# EAGLE board dome-board2 (EAGLE 5.09)
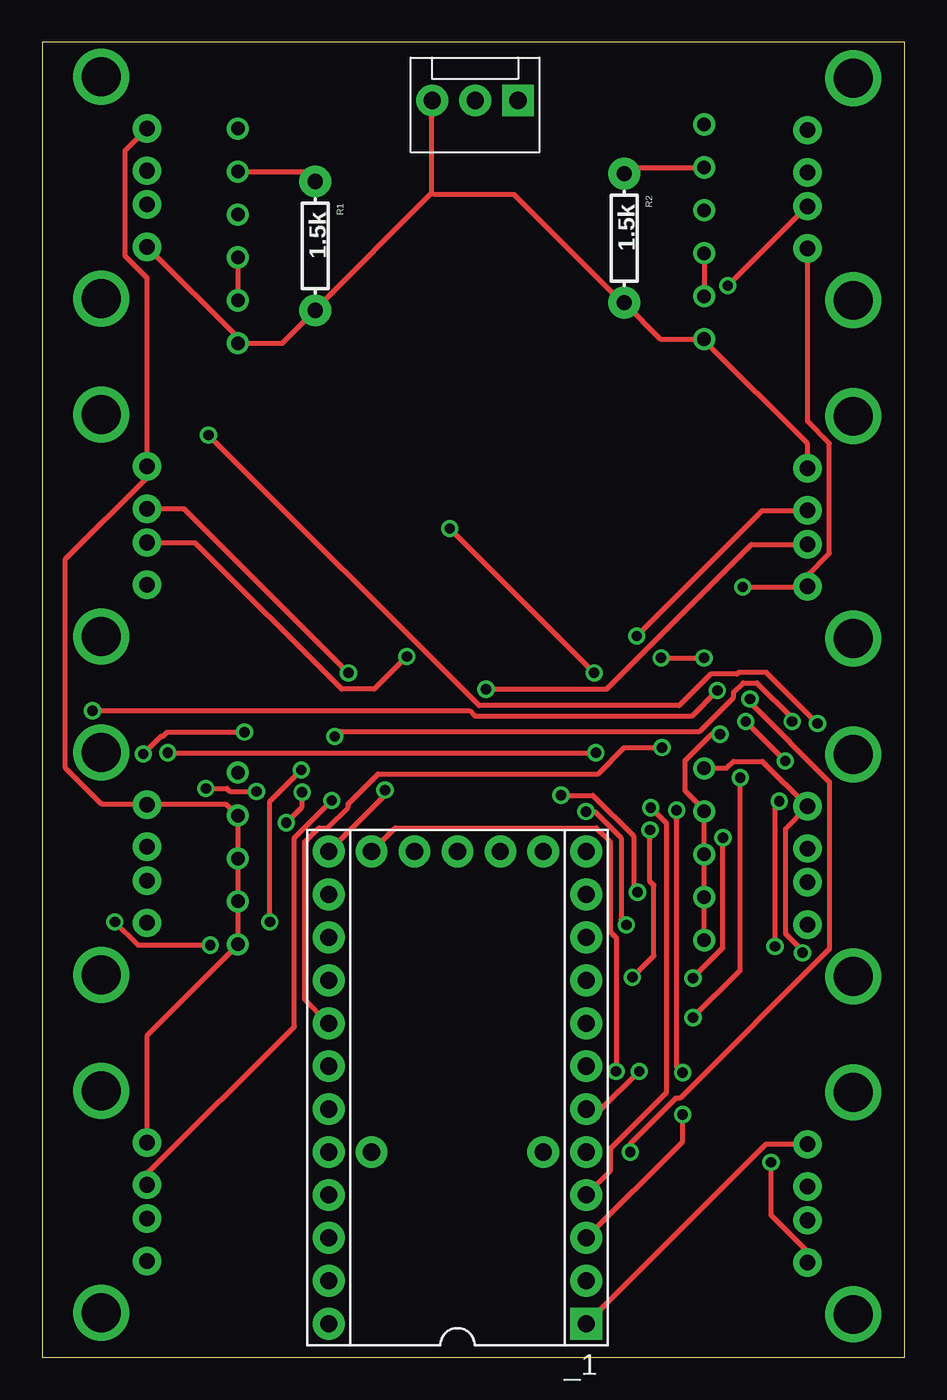
[diagram p0: board, top side]
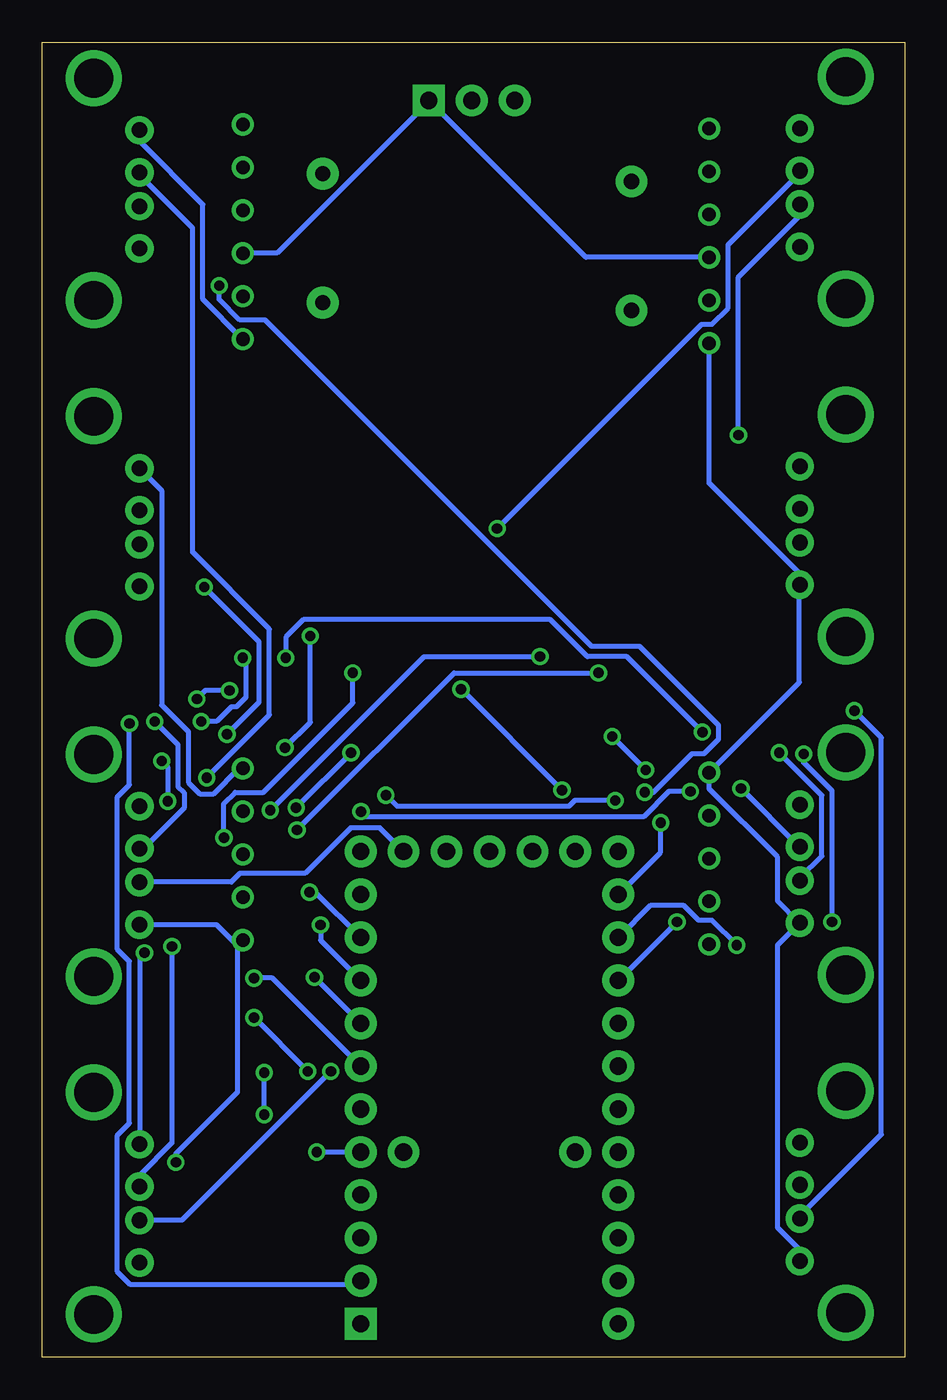
[diagram p1: board, bottom side, seen from below]

Size 51 x 77.8 mm. Coordinates in mm from the lower left corner, seen from the top.
Outline: 0,0 51,0 51,77.8 0,77.8 0,0
Copper layers (1*16): Top 0.035mm / dielectric 1.5mm / Bottom 0.035mm
Design rules "default": minimum track width 10mil, minimum drill 24mil, track to track 8mil, track to pad 8mil, pad to pad 8mil, via to via 8mil, smd to smd 8mil, copper to edge 40mil, drill to drill 8mil, minimum pad ring 10mil, minimum via ring 8mil, stop-mask expansion 4mil, vias tented up to drill 0mil, thermal gap 10mil
Net classes: 0 default: width 0.305 mm, clearance 0.305 mm; 1 power: width 3.124 mm, clearance 0.635 mm
Holes 3.2 mm at -9.7,6.3 100.2,83.8 97.6,90.7 98,3.2

## Footprints (pad centres in the part's own frame; a part is rotated, then mirrored left to right if it is on the bottom)
TEENSY = drill 1.016 pad 1.88 round: 5V2 13.97,-2.54; +5V -13.97,7.62; B0 -11.43,-7.62; B1 -8.89,-7.62; B2 -6.35,-7.62; B3 -3.81,-7.62; B4 8.89,7.62; B5 6.35,7.62; B6 3.81,7.62; B7 -1.27,-7.62; C6 11.43,-7.62; C7 13.97,-7.62; D0 1.27,-7.62; D1 3.81,-7.62; D2 6.35,-7.62; D3 8.89,-7.62; D4 13.97,5.08; D5 13.97,-5.08; D6 13.97,7.62; D7 11.43,7.62; E6 -3.81,-5.08; F0 -11.43,7.62; F1 -8.89,7.62; F4 -6.35,7.62; F5 -3.81,7.62; F6 -1.27,7.62; F7 1.27,7.62; GRND1 13.97,0; REF -3.81,5.08; RST 13.97,2.54 | drill 1.016 pad 1.88 square: GND -13.97,-7.62
OKX2-T/16-D12P-C = drill 0.8 round: GND@1 13.97,0; GND@2 -11.43,0; NC -19.05,0; ON/OFF -24.13,0; SENSE 19.05,0; TRIM -21.59,0; VIN@1 -13.97,0; VIN@2 -16.51,0; VOUT@1 24.13,0; VOUT@2 21.59,0; VOUT@3 16.51,0
MOLEX-1X3 = drill 1.016 pad 1.88 square: 1 0,0 | drill 1.016 pad 1.88 round: 2 2.54,0; 3 5.08,0
AXIAL-0.3 = drill 0.9 pad 1.88 round: P$1 -3.81,0; P$2 3.81,0
USBA = drill 0.92 pad 1.676 round: D+ 0,-1; D- 0,1; GND 0,-3.5; VBUS 0,3.5 | drill 2.3 round: GND2 -2.71,-6.57; GND3 -2.71,6.57

## Placement (x,y rotation side)
_1  TEENSY  [TEENSY]  24.55,15.95 90 top
DC1  OKX2-T/16-D12P-C  [OKX2-T/16-D12P-C]  11.57,48.56 270 top
DC2  OKX2-T/16-D12P-C  [OKX2-T/16-D12P-C]  39.14,48.81 270 top
JP1  VIN  [MOLEX-1X3]  28.14,74.35 180 top
R1  1.5k  [AXIAL-0.3]  16.15,65.75 270 top
R2  1.5k  [AXIAL-0.3]  34.41,66.21 270 top
USB1  USB  [USBA]  6.2,69.2 0 top
USB2  USB  [USBA]  6.2,49.2 0 top
USB3  USB  [USBA]  6.2,29.2 0 top
USB4  USB  [USBA]  6.2,9.2 0 top
USB5  USB  [USBA]  45.26,9.1 180 top
USB6  USB  [USBA]  45.26,29.1 180 top
USB7  USB  [USBA]  45.26,49.1 180 top
USB8  USB  [USBA]  45.26,69.1 180 top

## Library data of the parts
_1 = teensy
DC1 DC2 USB1-USB8 = MaxHenstell
JP1 R1 R2 = SparkFun

## Nets
GND: _1.GND DC1.GND@1 DC1.GND@2 DC2.GND@1 DC2.GND@2 JP1.3 R1.P$2 R2.P$2 USB1.GND USB2.GND USB3.GND USB4.GND USB5.GND USB6.GND USB7.GND USB8.GND
N$1: _1.B0 USB1.D+
N$2: _1.B1 USB2.D+
N$3: _1.B2 USB3.D+
N$4: _1.B3 USB4.D+
N$5: _1.B4 USB5.D+
N$6: _1.B5 USB6.D+
N$7: _1.B6 USB7.D+
N$8: _1.B7 USB8.D+
N$9: _1.D0 USB1.D-
N$10: _1.D1 USB2.D-
N$11: _1.D2 USB3.D-
N$12: _1.D3 USB4.D-
N$13: _1.D4 USB5.D-
N$14: _1.D5 USB6.D-
N$15: _1.D6 USB7.D-
N$16: _1.D7 USB8.D-
N$17: DC1.TRIM R1.P$1
N$19: DC2.TRIM R2.P$1
VCC1: DC1.SENSE DC1.VOUT@1 DC1.VOUT@2 DC1.VOUT@3 USB1.VBUS USB2.VBUS USB3.VBUS USB4.VBUS
VCC2: DC2.SENSE DC2.VOUT@1 DC2.VOUT@2 DC2.VOUT@3 USB5.VBUS USB6.VBUS USB7.VBUS USB8.VBUS
VIN: DC1.VIN@1 DC1.VIN@2 DC2.VIN@1 DC2.VIN@2 JP1.1

## Tracks (layer width: path | path; a pad name or v marks a point on that pad's centre or on a via)
GND  (via drill 0.61)
  Top 0.305: USB1.GND 6.22,65.69 11.79,60.12 DC1.GND@2 11.58,60 14.2,60 16.13,61.93 R1.P$2 16.23,62.08 23.04,68.89 | 23.04,68.89 23.04,74.35 JP1.3 | USB5.GND 42.8,12.6 32.18,1.98 _1.GND | DC2.GND@1 39.17,34.85 40.46,34.85 40.87,35.26 42.6,35.26 45.24,32.62 USB6.GND 45.16,32.49 43.94,31.27 43.94,25.07 44.96,24.05 v44.96,23.93 | USB7.GND 45.24,52.6 45.24,54.08 39.22,60.1 DC2.GND@2 36.55,60.25 34.42,62.38 R2.P$2 34.27,62.43 27.89,68.81 23.16,68.81 23.04,68.89
  Bottom 0.305: USB4.GND 6.22,5.72 6.22,6.38 7.52,7.67 7.52,24.39 6.33,25.58 USB3.GND 6.22,25.71 7.52,27 7.52,29.59 11.56,33.63 11.56,34.57 DC1.GND@1 11.46,34.7 6.22,39.93 6.22,45.7 USB2.GND 6.3,45.82 6.3,46.46 11.56,51.72 11.56,59.97 DC1.GND@2 | USB8.GND 45.24,72.59 45.24,71.93 41.5,68.2 41.5,62.59 39.17,60.25 DC2.GND@2 | DC2.GND@1 39.17,34.82 39.37,34.82 40.87,33.33 41.68,33.33 42.37,34.01 42.37,37.01 43.94,38.58 43.94,51.28 45.24,52.58 USB7.GND | v44.96,23.93 45.24,23.65 45.24,12.6 USB5.GND
N$1  (via drill 0.61)
  Top 0.305: v9.83,54.56 25.83,38.56 37.67,38.56 39.52,40.41 41.1,40.41 41.2,40.52 42.82,40.52 v45.85,37.49
  Bottom 0.305: v9.83,54.56 9.83,63.91 6.22,67.52 6.22,68.18 USB1.D+ | v45.85,37.49 45.85,33.86 46.56,33.15 46.56,24.13 45.85,23.42 45.85,13.85 46.56,13.13 46.56,5.06 45.8,4.29 32.38,4.29 32.18,4.5 _1.B0
N$2  (via drill 0.61)
  Top 0.305: v21.57,41.45 19.63,39.52 17.7,39.52 9.04,48.18 6.22,48.18 USB2.D+ | v37.52,32.36 37.52,17.2 v37.87,16.84 | v37.87,14.35 37.87,12.75 32.18,7.06 _1.B1
  Bottom 0.305: v21.57,41.45 28.42,41.45 v37.52,32.36 | v37.87,14.35 v37.87,16.84
N$3  (via drill 0.61)
  Top 0.305: v7.42,35.77 v32.74,35.77 | v35.99,32.51 36.91,31.6 36.91,15.65 33.58,12.32 33.58,11 32.18,9.6 _1.B2
  Bottom 0.305: v7.42,35.77 4.9,33.25 4.9,29.64 6.2,28.35 6.2,28.22 USB3.D+ | v32.74,35.77 v35.99,32.51
N$4  (via drill 0.61)
  Top 0.305: v2.97,38.25 25.27,38.25 25.58,37.95 38.43,37.95 v39.93,39.45 | v41.86,38.94 41.86,38.74 46.56,34.04 46.56,24.16 37.72,15.32 37.47,15.32 34.77,12.62 v34.77,12.14
  Bottom 0.305: v2.97,38.25 1.37,36.65 1.37,13.18 6.2,8.36 USB4.D+ | v39.93,39.45 41.35,39.45 v41.86,38.94 | v34.77,12.14 32.18,12.14 _1.B3
N$5  (via drill 0.61)
  Top 0.305: v43.33,24.31 43.33,32.64 v43.59,32.89 | v41.6,37.62 v43.94,35.28 | v36.6,41.38 v39.14,41.38 | v11.96,36.98 7.39,36.98 7.14,36.73 7.01,36.73 v5.97,35.69 | v4.29,25.76 5.66,24.39 v9.93,24.39
  Bottom 0.305: v43.33,24.31 43.33,12.68 45.24,10.77 45.24,10.11 USB5.D+ | v43.59,32.89 43.59,34.93 v43.94,35.28 | v41.6,37.62 40.69,37.62 39.83,38.48 39.52,38.48 38.96,39.04 38.96,41.2 v39.14,41.38 | v36.6,41.38 36.6,42.6 35.56,43.64 20.95,43.64 18.77,41.45 16.43,41.45 v11.96,36.98 | v5.97,35.69 5.97,35.18 4.29,33.5 v4.29,25.76 | v9.93,24.39 11.4,25.86 12.19,25.86 13.06,26.72 15.04,26.72 16.92,24.84 _1.B4
N$6  (via drill 0.61)
  Top 0.305: v44.35,37.62 44.35,37.82 42.27,39.91 41.45,39.91 40.89,39.35 40.89,39.04 38.89,37.03 17.6,37.03 v17.3,36.73 | v15.32,34.75 13.46,32.89 v13.46,25.76
  Bottom 0.305: v44.35,37.62 42.98,36.25 42.98,33.76 42.62,33.4 42.62,32.49 45.01,30.1 45.24,30.1 USB6.D+ | v15.32,34.75 v17.3,36.73 | v13.46,25.76 16.92,22.3 _1.B5
N$7  (via drill 0.61)
  Top 0.305: v35.15,42.67 42.57,50.09 45.24,50.09 USB7.D+ | v36.65,36.07 34.42,36.07 32.87,34.52 19.86,34.52 18.09,32.74 18.09,32.54 16.87,31.32 16.36,31.32 15.52,30.48 15.52,21.16 16.92,19.76 _1.B6
  Bottom 0.305: v35.15,42.67 35.15,37.57 v36.65,36.07
N$8  (via drill 0.61)
  Top 0.305: v41.27,34.29 41.27,22.89 v38.48,20.09 | v35.31,16.92 33.07,14.68 32.18,14.68 _1.B7
  Bottom 0.305: v41.27,34.29 37.57,38 37.57,43.08 42.11,47.63 42.11,66.8 45.24,69.93 45.24,70.08 USB8.D+ | v35.31,16.92 v38.48,20.09
N$9  (via drill 0.61)
  Top 0.305: v32.64,40.49 v24.11,49.02 | v40.26,30.74 40.26,24.21 v38.48,22.43
  Bottom 0.305: v24.11,49.02 12.01,61.11 11.4,61.11 10.44,62.08 10.44,65.81 6.22,70.03 6.22,70.18 USB1.D- | v32.64,40.49 32.64,38.71 37.92,33.43 39.6,33.43 40.26,32.77 v40.26,30.74 | v38.48,22.43 37.39,22.43 32.18,17.22 _1.D0
N$10  (via drill 0.61)
  Top 0.305: v18.11,40.49 8.41,50.19 6.22,50.19 USB2.D- | v35.94,31.19 35.94,28.14 36.17,27.92 36.17,23.75 v34.9,22.48
  Bottom 0.305: v18.11,40.49 26.64,40.49 v35.94,31.19 | v34.9,22.48 32.18,19.76 _1.D1
N$11  (via drill 0.61)
  Top 0.305: v9.68,33.66 10.92,33.66 11.1,33.48 v12.68,33.48 | v32.16,32.28 32.66,32.28 34.24,30.71 34.24,25.88 v34.54,25.58
  Bottom 0.305: v9.68,33.66 6.22,30.2 USB3.D- | v12.68,33.48 13.95,33.48 15.44,31.98 31.85,31.98 v32.16,32.28 | v34.54,25.58 34.54,24.66 32.18,22.3 _1.D2
N$12  (via drill 0.61)
  Top 0.305: v17.12,32.95 14.91,30.74 14.91,19.56 6.22,10.87 6.22,10.21 USB4.D- | v30.68,33.25 32.56,33.25 34.98,30.84 34.98,27.74 v35.2,27.51
  Bottom 0.305: v17.12,32.95 19.51,32.95 19.86,32.59 30.02,32.59 v30.68,33.25 | v35.2,27.51 34.85,27.51 32.18,24.84 _1.D3
N$13  (via drill 0.61)
  Top 0.305: v33.93,16.92 33.93,24.82 33.58,25.17 33.58,30.51 32.77,31.32 20.88,31.32 _1.D4
  Bottom 0.305: v33.93,16.92 42.75,8.1 45.24,8.1 USB5.D-
N$14
  Bottom 0.305: USB6.D- 45.24,28.12 39.83,28.12 39.32,28.63 35.46,28.63 32.77,31.32 31.04,31.32 29.64,29.92 _1.D5
N$15  (via drill 0.61)
  Top 0.305: v26.24,39.52 33.38,39.52 41.94,48.08 45.24,48.08 USB7.D- | v20.27,33.55 20.27,33.25 16.94,29.92 _1.D6
  Bottom 0.305: v20.27,33.55 v26.24,39.52
N$16  (via drill 0.61)
  Top 0.305: v40.54,63.4 45.24,68.1 USB8.D- | v15.37,33.43 15.37,32.56 v14.43,31.62
  Bottom 0.305: v40.54,63.4 40.54,62.59 39.32,61.37 37.82,61.37 18.52,42.06 15.67,42.06 11,37.39 11,36.58 11.86,35.71 12.57,35.71 14.86,33.43 v15.37,33.43 | v14.43,31.62 14.43,29.87 16.92,27.38 _1.D7
N$17
  Top 0.305: DC1.TRIM 11.58,70.13 15.57,70.13 16.13,69.57 R1.P$1
N$19
  Top 0.305: DC2.TRIM 39.14,70.39 34.77,70.39 R2.P$1
VCC1
  Top 0.305: USB1.VBUS 4.9,71.4 4.9,65.15 6.2,63.86 USB2.VBUS 6.17,52.55 6.17,52.02 1.37,47.22 1.37,34.88 3.53,32.72 6.04,32.72 USB3.VBUS 6.22,32.69 10.87,32.69 11.43,32.13 DC1.VOUT@3 11.58,32.03 11.58,29.64 DC1.SENSE 11.58,29.49 11.58,27.1 DC1.VOUT@2 11.58,26.95 11.58,24.44 DC1.VOUT@1 11.48,24.31 6.22,19.05 6.22,12.7 USB4.VBUS
VCC2  (via drill 0.61)
  Top 0.305: USB8.VBUS 45.26,65.58 45.26,55.37 46.56,54.08 46.56,47.55 45.26,46.25 45.26,45.62 USB7.VBUS 45.11,45.57 v41.43,45.57 | DC2.VOUT@1 39.14,27.2 DC2.VOUT@2 39.14,27.36 39.14,29.74 DC2.SENSE 39.14,29.9 39.14,32.28 DC2.VOUT@3 39.09,32.44 38.02,33.5 38.02,35.31 39.57,36.86 v40.08,36.86 | v43.1,11.53 43.1,8.41 45.24,6.28 45.24,5.62 USB5.VBUS
  Bottom 0.305: v43.1,11.53 43.1,12.04 39.45,15.7 39.45,24.39 39.17,24.66 DC2.VOUT@1 39.57,24.46 40.69,25.58 45.24,25.58 USB6.VBUS | v41.43,45.57 38.18,42.32 38.18,38.76 v40.08,36.86
VIN
  Top 0.305: DC2.VIN@1 39.14,65.31 DC2.VIN@2 | DC1.VIN@1 11.58,62.54 11.58,65.05 DC1.VIN@2
  Bottom 0.305: DC1.VIN@2 11.58,65.08 18.85,65.08 28.12,74.35 JP1.1 28.22,74.22 37.11,65.33 DC2.VIN@2